# Altium PCB TFG_PSoC_PCB.PcbDoc
Units mm, origin at the board's own origin, x right, y up, seen from the top; angles counter-clockwise.
Board outline 28.96 x 63.5 mm, 6 copper layers (Top Layer, VDD, Signal Layer Top, Signal Layer Bottom, GND, Bottom Layer), stack 1.104 mm thick; 35 components, 24 nets, 191 pads, 90 vias.
Unrouted connection lines stored in the file: 13.
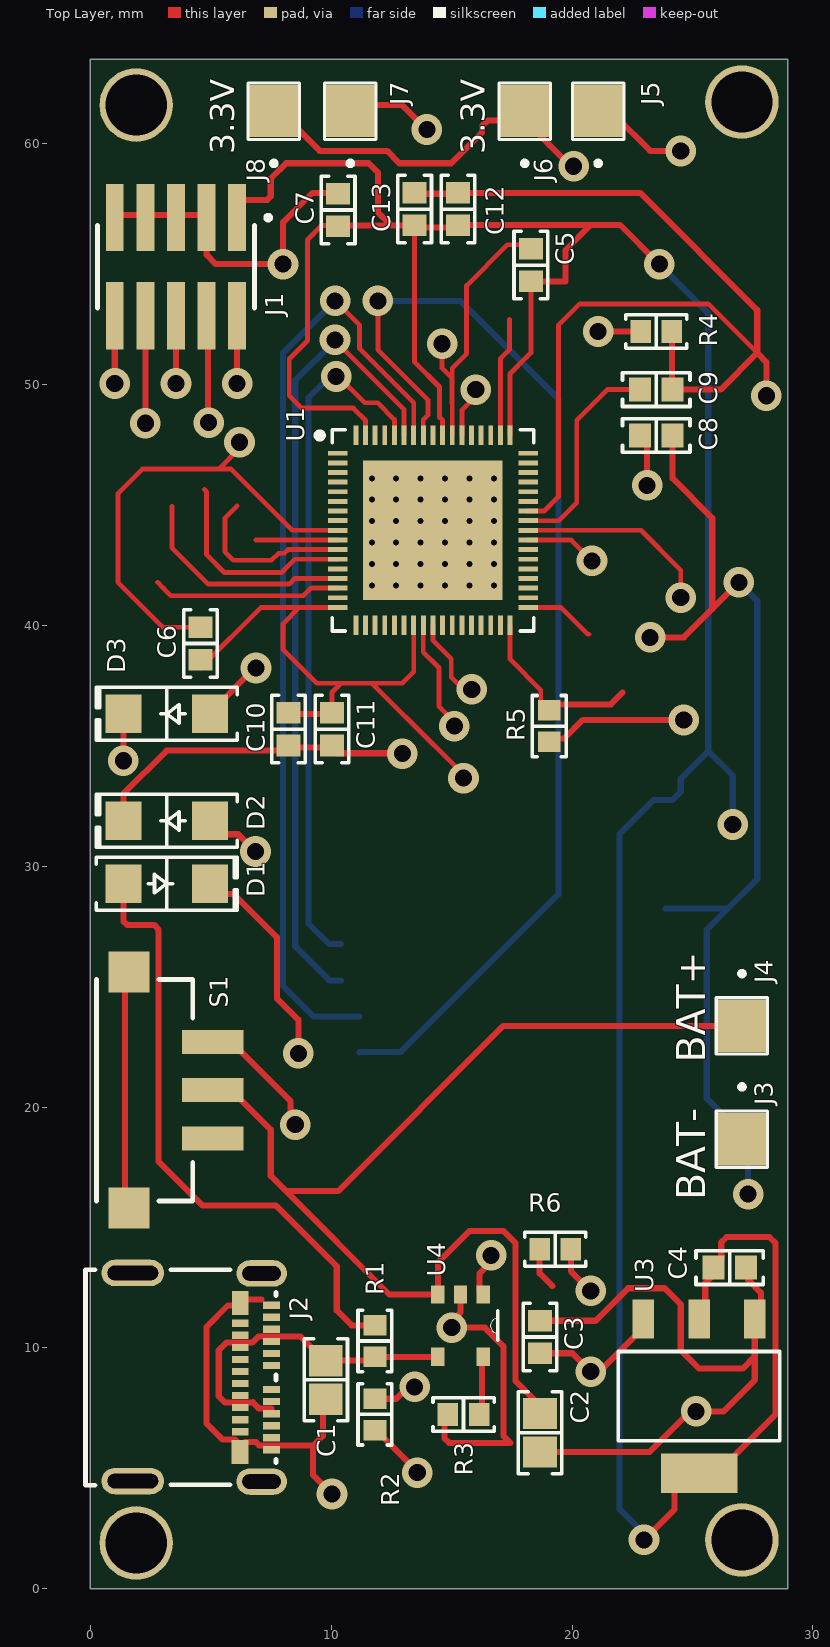
[diagram p0: Top Layer view]
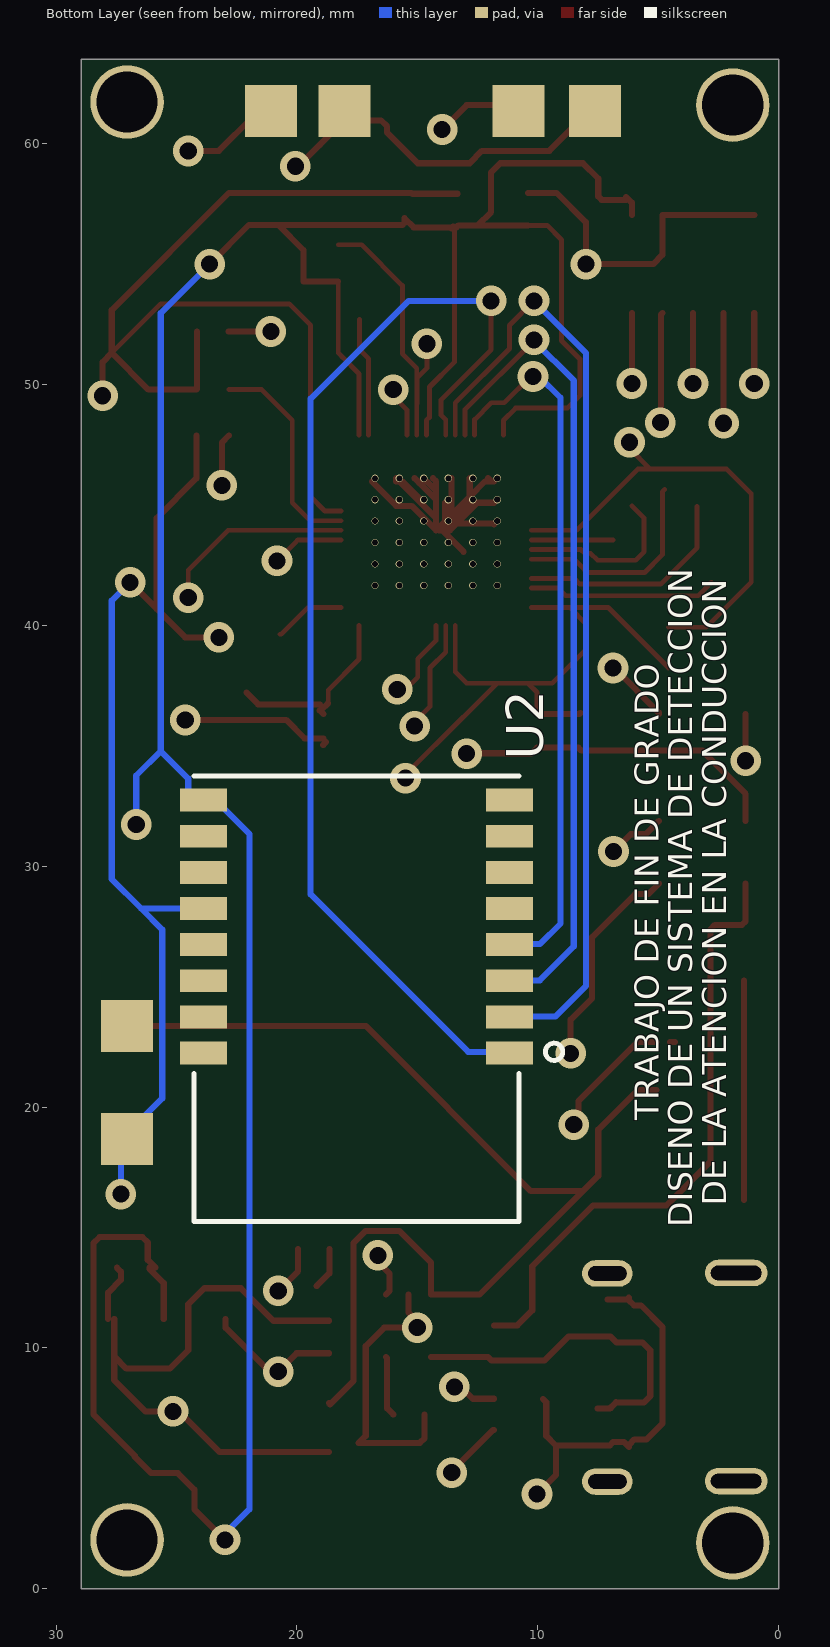
[diagram p1: Bottom Layer view, seen from below]
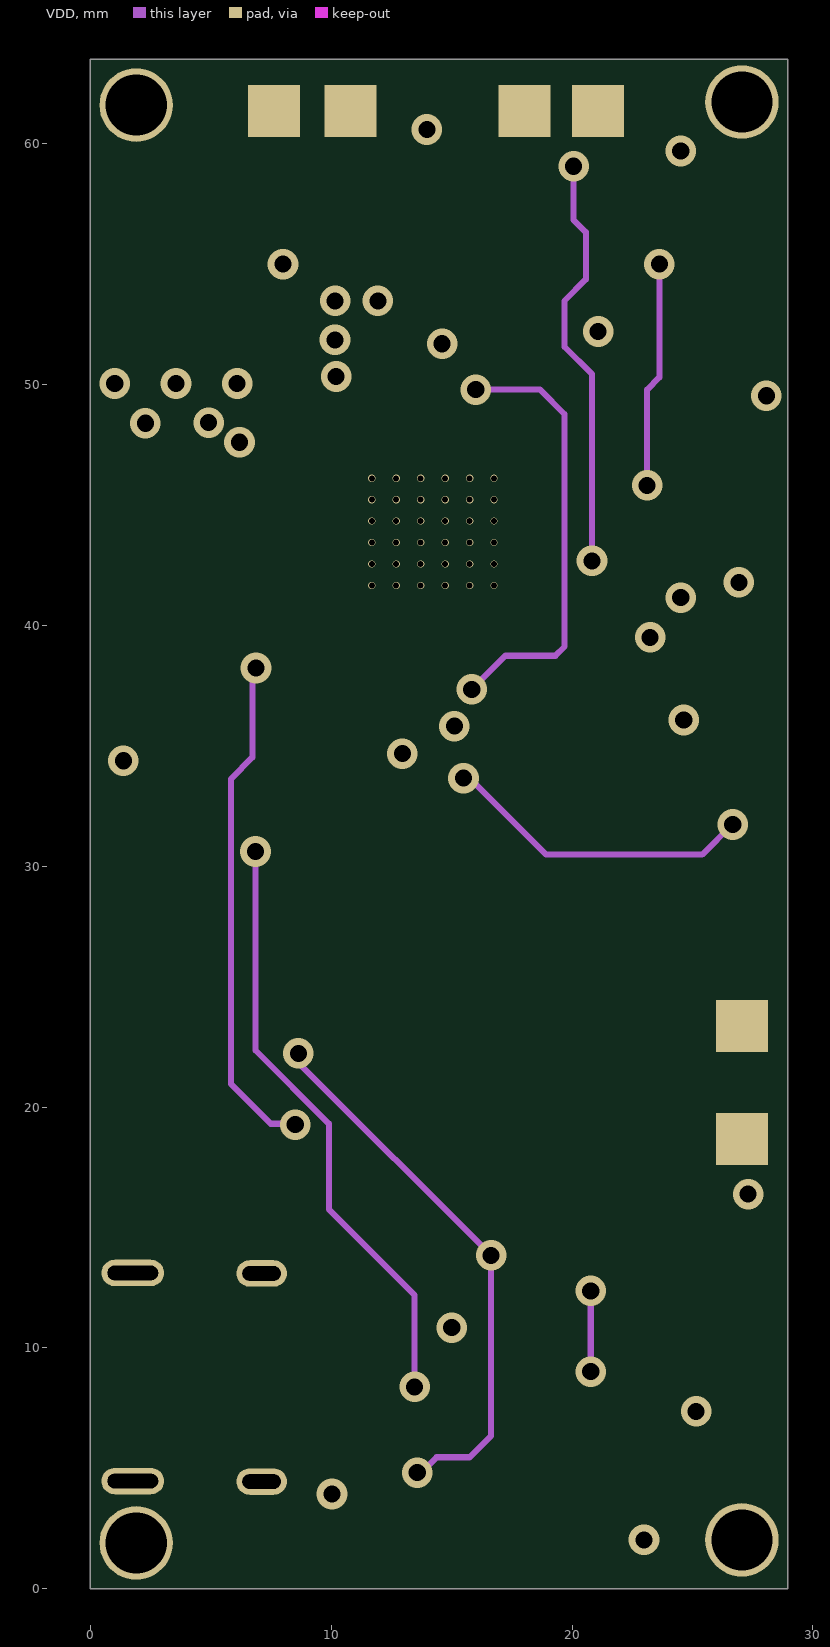
[diagram p2: VDD]
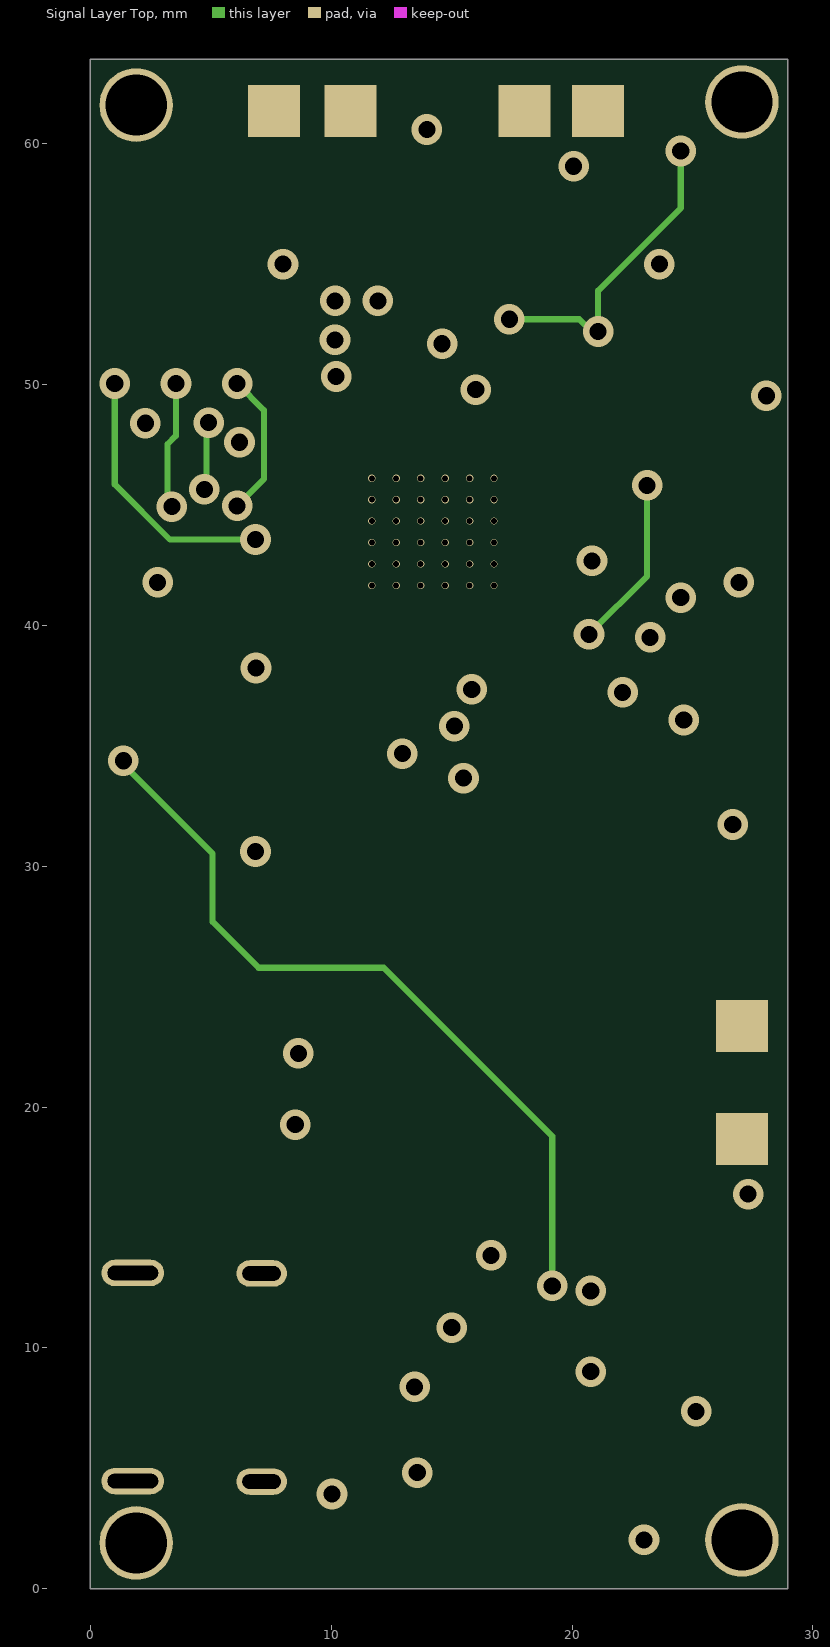
[diagram p3: Signal Layer Top]
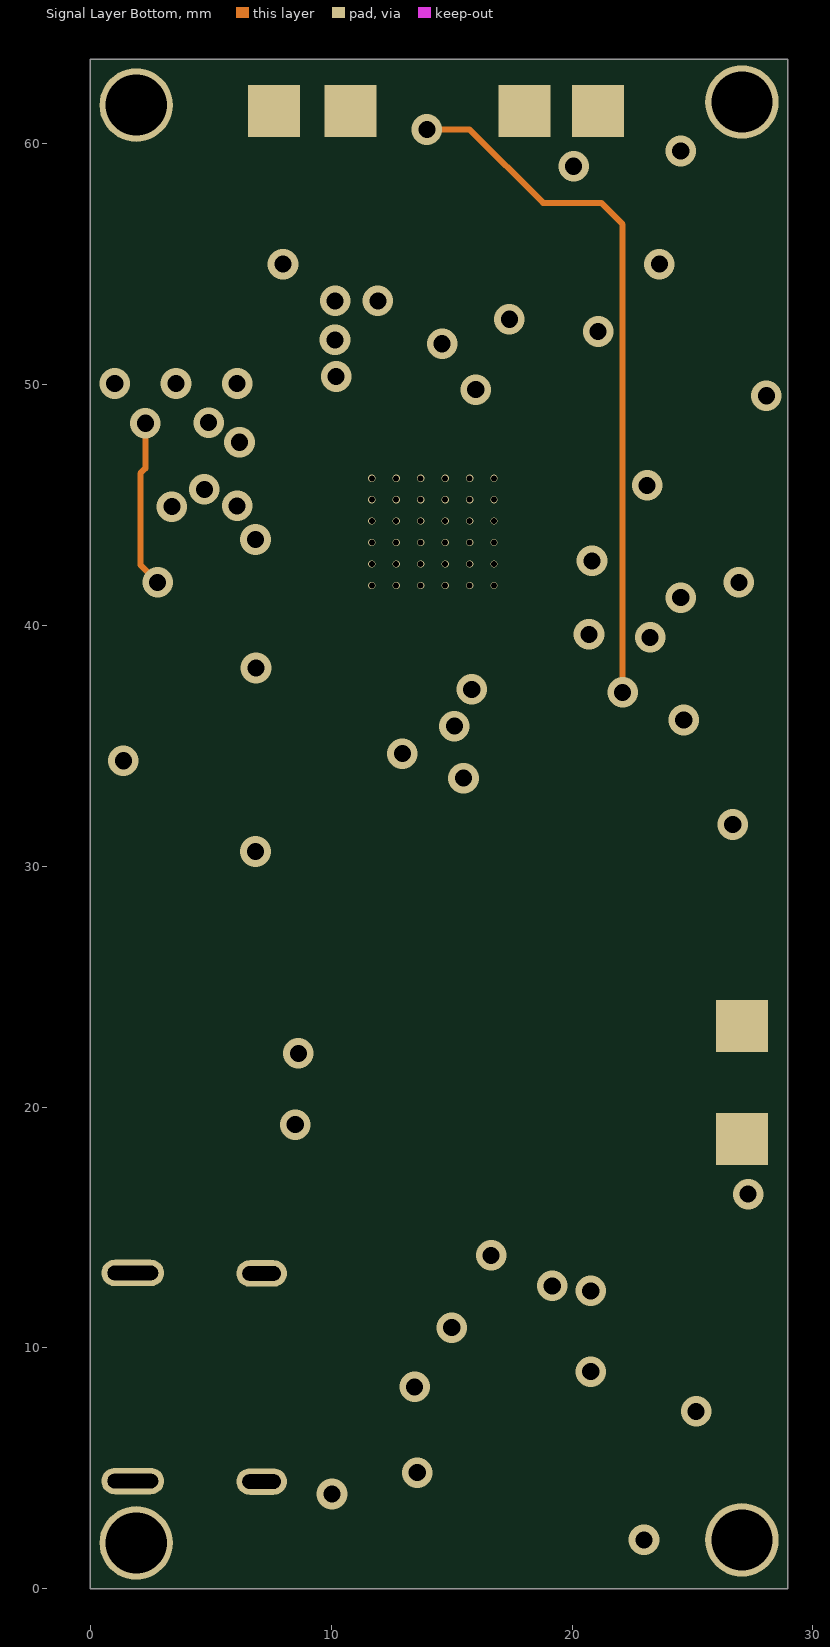
[diagram p4: Signal Layer Bottom]
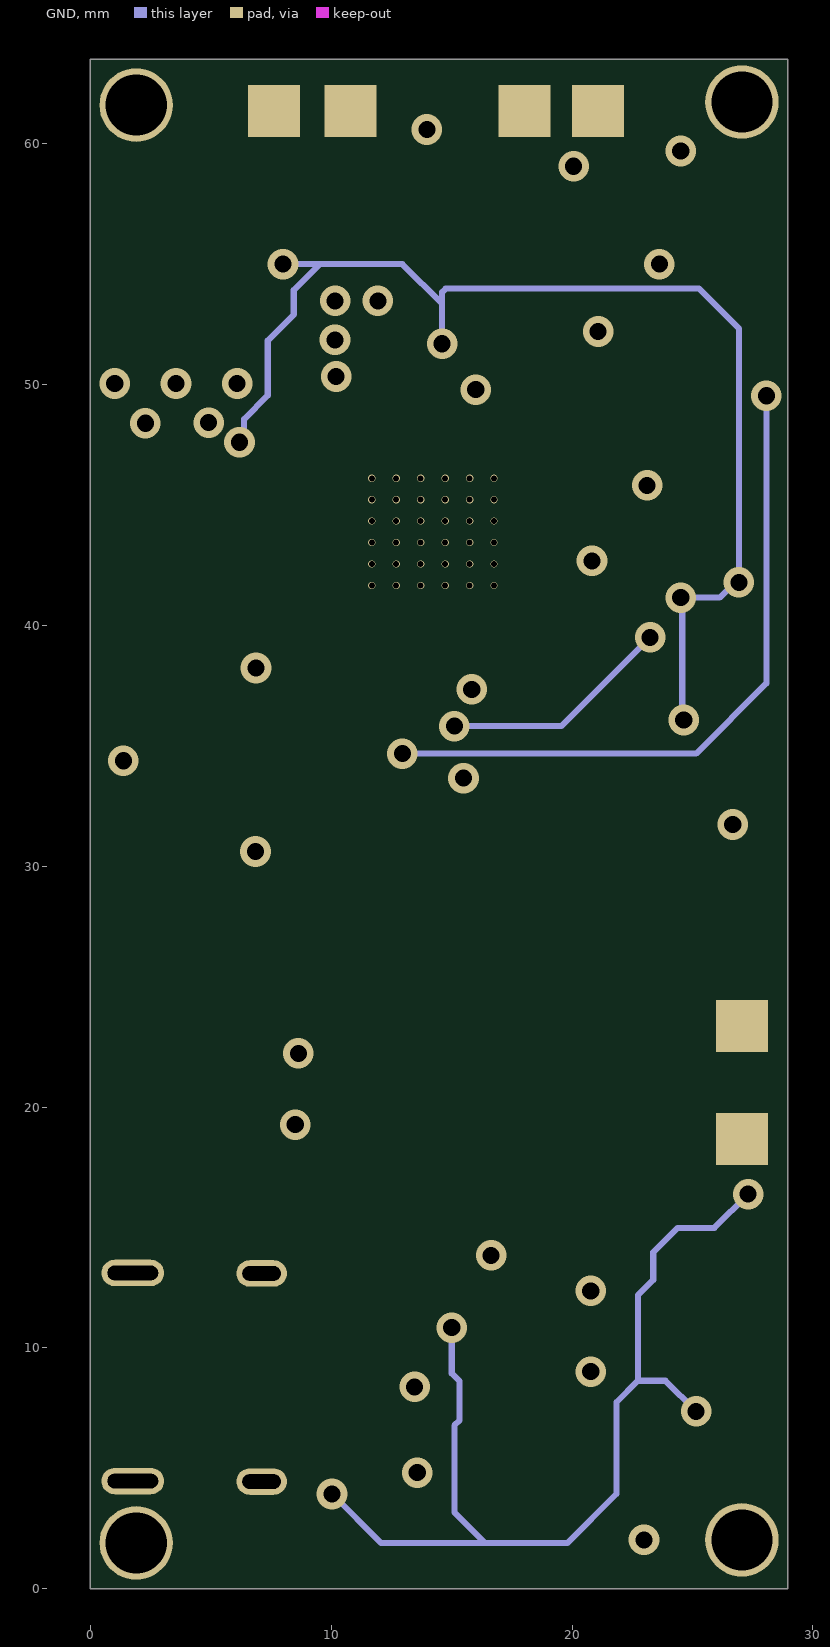
[diagram p5: GND]
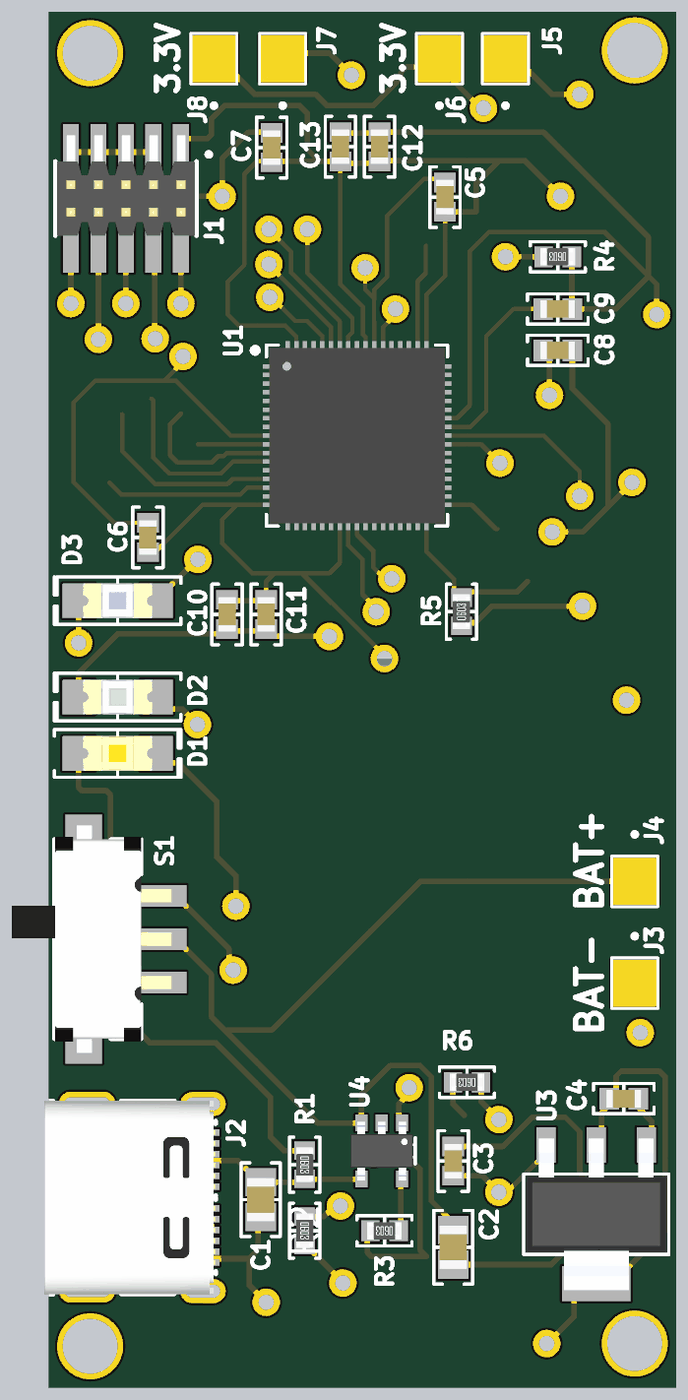
[diagram p6: 3D render of the assembled board from above, using the file's embedded part models]

## Layer stack, top to bottom
Top Solder: solder mask 0.0102, Solder Resist, Dk 3.5
Top Layer: signal copper 0.0356
Dielectric 1: core 0.254, PP-006, Dk 4.1
VDD: signal copper 0.036
Dielectric 5: prepreg 0.127, PP-006, Dk 4.1
Signal Layer Top: signal copper 0.036
Dielectric 3: dielectric 0.127, FR-4, Dk 4.8
Signal Layer Bottom: signal copper 0.036
Dielectric 2: prepreg 0.127, PP-006, Dk 4.1
GND: signal copper 0.036
Dielectric 4: core 0.254, PP-006, Dk 4.1
Bottom Layer: signal copper 0.0356
Bottom Solder: solder mask 0.0102, Solder Resist, Dk 3.5

## Board outline
0,0 0,63.5 28.956,63.5 28.956,0

## Design rules (kind name [scope] priority, off if disabled: settings)
Clearance [All] p1: gap=0.254 ignorepadtopadclearanceinfootprint=FALSE except(0: Arc-Hole Track-Hole SMDPad-Hole THPad-Hole Via-Hole Fill-Hole Poly-Hole Region-Hole Text-Hole)
PolygonConnect [All] p1: connectstyle=Relief reliefconductorwidth=0.254 reliefentries=4 polygonreliefangle="90 Angle" airgapwidth=0.254
RoutingVias [All] p1: holewidth=0.711 width=1.27 viastyle="Through Hole" minholewidth=0.711 minwidth=1.27 maxholewidth=0.711 maxwidth=1.27
SolderMaskExpansion [All] p1: expansion=0.102 istentingtop=FALSE
Width [All] p1: maxlimit=0.254 minlimit=0.254 preferedwidth=0.254
30 further rules are at their usual default settings.

## Components (designator, comment, footprint, x,y, rotation, side; value= is the part's Value field where it differs from the comment)
C1 "4.7 µF" "CAP 0805_2012" 9.779,8.674 r90 top
C2 "4.7 µF" "CAP 0805_2012" 18.669,6.477 r270 top
C3 "1 µF" "CAP 0603_1608" 18.669,10.454 r270 top
C4 "1 µF" "CAP 0603_1608" 26.543,13.335 r180 top
C5 "0.1 µF" "CAP 0603_1608" 18.288,54.951 r270 top
C6 "0.1 µF" "CAP 0603_1608" 4.572,39.243 r270 top
C7 "0.1 µF" "CAP 0603_1608" 10.287,57.237 r270 top
C8 "0.1 µF" "CAP 0603_1608" 23.495,47.879 r180 top
C9 "0.1 µF" "CAP 0603_1608" 23.495,49.784 r180 top
C10 "1 µF" "CAP 0603_1608" 8.229,35.687 r90 top
C11 "0.1 µF" "CAP 0603_1608" 10.033,35.687 r90 top
C12 "1 µF" "CAP 0603_1608" 15.266,57.277 r270 top
C13 "0.1 µF" "CAP 0603_1608" 13.462,57.277 r270 top
D1 "Red" "LED 1206_3216 YELLOW" 3.175,29.273 r0 top value=Yellow
D2 "Green" "LED 1206_3216 GREEN" 3.175,31.877 r180 top
D3 "Blue" "LED 1206_3216 BLUE" 3.175,36.322 r180 top
J1 "FTSH-105-01-F-DV-P-TR" SAMTEC_FTSH-105-01-F-DV-P-TR 3.556,54.887 r180 top
J2 "1054500101" "Molex 1054500101" 6.868,8.772 r270 top
J3 "103321-1" TE_103321-1 27.051,18.669 r0 top
J4 "103321-1" TE_103321-1 27.051,23.368 r0 top
J5 "103321-1" TE_103321-1 21.082,61.341 r180 top
J6 "103321-1" TE_103321-1 18.034,61.341 r180 top
J7 "103321-1" TE_103321-1 10.795,61.341 r180 top
J8 "103321-1" TE_103321-1 7.62,61.341 r180 top
R1 "470 Ohms" "RES 0603_1608" 11.811,10.287 r270 top
R2 "470 Ohms" "RES 0603_1608" 11.811,7.239 r270 top
R3 "20 kOhms" "RES 0603_1608" 15.494,7.239 r180 top
R4 "30 kOhms" "RES 0603_1608" 23.495,52.197 r180 top
R5 "30 kOhms" "RES 0603_1608" 19.05,35.814 r90 top
R6 "470 Ohms" "RES 0603_1608" 19.304,14.097 r180 top
S1 "SS312SAH4-R" "NKK SS312SAH4" 2.255,20.701 r0 top
U1 "CY8C5888LTI-LP097" QFN-68 14.224,43.942 r0 top
U2 "HM-11" XCVR_317030001 17.526,24.492 r0 bottom
U3 "ADP3338" SOT230P700X180-4N 25.273,8.001 r270 top
U4 "MCP73831T-2ADI/OT" SOT95P280X145-5N 15.367,10.922 r270 top

## Footprints (in the part's own frame and the unit in brackets; to place one, negate y for a bottom-side part, rotate by r counter-clockwise, add the part's x,y. Pads: shape width x height; smd on the part's side, far side on the other; paste and mask are expansions set on the pad)
"CAP 0603_1608" [mm] "Chip Capacitor, 2-Leads, Body 1.60x0.80mm, IPC Medium Density"
  rect 0.9x1 smd: 1(-0.675,0) 2(0.675,0)
  silkscreen extent -1.4,-0.7 1.4,0.7, body extent -0.8,-0.41 0.8,0.41, height 0.82
"CAP 0805_2012" [mm] "Chip Capacitor, 2-Leads, Body 2.00x1.20mm, IPC Medium Density"
  rect 1.3x1.4 smd: 1(-0.8,0) 2(0.8,0)
  silkscreen extent -1.7,-0.9 1.7,0.9, body extent -1,-0.64 1,0.64, height 1.26
"LED 1206_3216 BLUE" [mm] "Chip Diode, 2-Leads, Body 3.13x1.55mm, IPC Medium Density"
  rect 1.5x1.6 smd: 1(-1.8,0) 2(1.8,0)
  silkscreen extent -2.92,-1.1 2.92,1.1, body extent -1.6,-0.8 1.6,0.8, height 0.9
"LED 1206_3216 GREEN" [mm] "Chip Diode, 2-Leads, Body 3.13x1.55mm, IPC Medium Density"
  rect 1.5x1.6 smd: 1(-1.8,0) 2(1.8,0)
  silkscreen extent -2.92,-1.1 2.92,1.1, body extent -1.6,-0.8 1.6,0.8, height 0.9
"LED 1206_3216 YELLOW" [mm] "Chip Diode, 2-Leads, Body 3.13x1.55mm, IPC Medium Density"
  rect 1.5x1.6 smd: 1(-1.8,0) 2(1.8,0)
  silkscreen extent -2.92,-1.1 2.92,1.1, body extent -1.6,-0.8 1.6,0.8, height 0.9
"Molex 1054500101" [mm] "USB-C Receptacle Connector 24 Position Surface Mount, 24 Position, Body 8.94x7.90mm"
  rect 0.3x0.7 smd: A1(-3,0.655) A2(-2.5,0.655) A3(-2,0.655) A4(-1.5,0.655) A5(-1,0.655) A6(-0.5,0.655) A7(0.5,0.655) A8(1,0.655) A9(1.5,0.655) A10(2,0.655) A11(2.5,0.655) A12(3,0.655) B2(2.25,-0.645) B3(1.75,-0.645) B4(1.25,-0.645) B5(0.75,-0.645) B6(0.25,-0.645) B7(-0.25,-0.645) B8(-0.75,-0.645) B9(-1.25,-0.645) B10(-1.75,-0.645) B11(-2.25,-0.645)
  rect 1x0.7 smd: B1(3.1,-0.655) B12(-3.1,-0.645)
  oval 1.1x2.6 hole 2.1 slot 0.6 at 0 deg unplated: S(-4.34,-5.105) S(4.3,-5.105)
  oval 1.1x2.1 hole 1.6 slot 0.6 at 0 deg unplated: S(-4.32,0.245) S(4.32,0.245)
  silkscreen extent -4.47,-7.06 4.47,0.84, body extent -4.47,-7.07 4.47,0.83, height 3.21
"NKK SS312SAH4" [mm]
  rect 2.55x1 smd: 1(2.825,-2) 2(2.825,0) 3(2.825,2)
  rect 1.7x1.7 smd: M(-0.65,-4.9) M(-0.65,4.9)
  silkscreen extent -2,-4.6 2,4.6, body extent -3.98,-5.25 3.42,5.25, height 2.9
QFN-68 [mil]
  rect 32x8 smd paste+0 mask+0: 1(-155.5,125.98) 2(-155.5,110.24) 3(-155.5,94.49) 4(-155.5,78.74) 5(-155.5,62.99) 6(-155.5,47.24) 7(-155.5,31.5) 8(-155.5,15.75) 9(-155.5,0) 10(-155.5,-15.75) 11(-155.5,-31.5) 12(-155.5,-47.24) 13(-155.5,-62.99) 14(-155.5,-78.74) 15(-155.5,-94.49) 16(-155.5,-110.24) 17(-155.5,-125.98) 35(155.5,-125.98) 36(155.5,-110.24) 37(155.5,-94.49) 38(155.5,-78.74) 39(155.5,-62.99) 40(155.5,-47.24) 41(155.5,-31.5) 42(155.5,-15.75) 43(155.5,0) 44(155.5,15.75) 45(155.5,31.5) 46(155.5,47.24) 47(155.5,62.99) 48(155.5,78.74) 49(155.5,94.49) 50(155.5,110.24) 51(155.5,125.98)
  rect 8x32 smd paste+0 mask+0: 18(-125.98,-155.5) 19(-110.24,-155.5) 20(-94.49,-155.5) 21(-78.74,-155.5) 22(-62.99,-155.5) 23(-47.24,-155.5) 24(-31.5,-155.5) 25(-15.75,-155.5) 26(0,-155.5) 27(15.75,-155.5) 28(31.5,-155.5) 29(47.24,-155.5) 30(62.99,-155.5) 31(78.74,-155.5) 32(94.49,-155.5) 33(110.24,-155.5) 34(125.98,-155.5) 52(125.98,155.5) 53(110.24,155.5) 54(94.49,155.5) 55(78.74,155.5) 56(62.99,155.5) 57(47.24,155.5) 58(31.5,155.5) 59(15.75,155.5) 60(0,155.5) 61(-15.75,155.5) 62(-31.5,155.5) 63(-47.24,155.5) 64(-62.99,155.5) 65(-78.74,155.5) 66(-94.49,155.5) 67(-110.24,155.5) 68(-125.98,155.5)
  rect 228x228 smd paste-113.5 mask+0: 69(0,0)
  silkscreen extent -190,-164 164,164, body extent -159,-159 159,159, height 39
"RES 0603_1608" [mm] "Chip Resistor, 2-Leads, Body 1.60x0.80mm, IPC Medium Density"
  rect 0.85x0.95 smd: 1(-0.65,0) 2(0.65,0)
  silkscreen extent -1.27,-0.7 1.27,0.7, body extent -0.8,-0.4 0.8,0.4, height 0.45
SAMTEC_FTSH-105-01-F-DV-P-TR [mm]
  rect 0.74x2.79 smd: 01(-2.54,-2.035) 02(-2.54,2.035) 03(-1.27,-2.035) 04(-1.27,2.035) 05(0,-2.035) 06(0,2.035) 07(1.27,-2.035) 08(1.27,2.035) 09(2.54,-2.035) 10(2.54,2.035)
  silkscreen extent -3.93,-2.13 3.26,1.72, body extent -3.18,-2.92 3.18,2.92, height 5.56
SOT95P280X145-5N [mil]
  rect 30x22 smd: 1(-51,37) 2(-51,0) 3(-51,-37) 4(51,-37) 5(51,37)
  silkscreen extent -24,49 24,61, body extent -53,-57 53,57, height 57
SOT230P700X180-4N [mil]
  rect 64x35 smd: 1(-126,91) 2(-126,0) 3(-126,-91)
  rect 64x125 smd: 4(126,0)
  silkscreen extent -73,-132 73,132, body extent -138,-128 138,128, height 71
TE_103321-1 [mil]
  rect 85x85 all layers, no hole: 1(0,0)
  silkscreen extent -42,-46 42,89
XCVR_317030001 [mm]
  rect 1.95x0.95 smd: 1(-6.35,2.25) 2(-6.35,0.75) 3(-6.35,-0.75) 4(-6.35,-2.25) 5(-6.35,-3.75) 6(-6.35,-5.25) 7(-6.35,-6.75) 8(-6.35,-8.25) 9(6.35,-8.25) 10(6.35,-6.75) 11(6.35,-5.25) 12(6.35,-3.75) 13(6.35,-2.25) 14(6.35,-0.75) 15(6.35,0.75) 16(6.35,2.25)
  silkscreen extent -8.56,-9.25 6.75,9.25, body extent -6.81,-9.15 6.69,9.35, height 1.7

## Part data
C1 C2: library part CL21B475KOFNFNE, "CAP CER 4.7UF 16V X7R 0805", Device Package="0805 (2012 Metric)", manufacturer="Samsung Electro-Mechanics", Operating Temperature="-55°C ~ 125°C", Supplier Part Number 1=1276-2970-1-ND, Temperature Coefficient=X7R, Tolerance=±10%, Voltage - Rated=16V, Applications="General Purpose", Capacitance="4.7 µF", componentlink1description=Datasheet, componentlink1url=http://www.samsungsem.com/kr/support/product-search/mlcc/CL21B475KOFNFNE.jsp, componentlink2description="DigiKey Link", componentlink2url=https://www.digikey.com/en/products/detail/samsung-electro-mechanics/CL21B475KOFNFNE/3888628, lastupdated="27/06/2022 11:05:52", Lifecycle Status=Active, Minimum Order=1, Mounting Type="Surface Mount, MLCC", Package / Case="0805 (2012 Metric)", packaging=TapeAndReel, Part Number=CL21B475KOFNFNE, Part Status=Active, partid=4760, price=0.03, series=CL, Size / Dimension="0.079\" L x 0.049\" W (2.00mm x 1.25mm)", Supplier 1=DigiKey, Thickness (Max)="0.053\" (1.35mm)"
C3 C4 C10 C12: library part C0603X105M4RACAUTO, "CAP CER 1UF 16V X7R 0603", Device Package="0603 (1608 Metric)", manufacturer=KEMET, Operating Temperature="-55°C ~ 125°C", Ratings=AEC-Q200, Supplier Part Number 1=399-17719-2-ND, Temperature Coefficient=X7R, Tolerance=±20%, Voltage - Rated=16V, Applications="Automotive, Boardflex Sensitive", Capacitance="1 µF", componentlink1description=Datasheet, componentlink1url=https://api.kemet.com/component-edge/download/datasheet/C0603X105M4RACAUTO.pdf, componentlink2description="DigiKey Link", componentlink2url=https://www.digikey.com/en/products/detail/kemet/C0603X105M4RACAUTO/8635846, Features="Soft Termination", lastupdated="27/06/2022 11:02:50", Lifecycle Status=Active, Minimum Order=1, Mounting Type="Surface Mount, MLCC", Package / Case="0603 (1608 Metric)", packaging=CutTape, Part Number=C0603X105M4RACAUTO, Part Status=Active, partid=3927, price=0.09, series="SMD Auto X7R Flex", Size / Dimension="0.063\" L x 0.031\" W (1.60mm x 0.80mm)", Supplier 1=DigiKey, Thickness (Max)="0.037\" (0.95mm)"
C5 C6 C7 C8 C9 C11 C13: library part CS0603KRX7R7BB104, "CAP CER 0.1UF 16V X7R 0603", Device Package="0603 (1608 Metric)", manufacturer=Yageo, Operating Temperature="-55°C ~ 125°C", Supplier Part Number 1=311-3560-1-ND, Temperature Coefficient=X7R, Tolerance=±10%, Voltage - Rated=16V, Applications="Boardflex Sensitive", Capacitance="0.1 µF", componentlink1description=Datasheet, componentlink1url=http://www.yageo.com/NewPortal/yageodocoutput?fileName=/pdf/MLCC/UPY-ST_NPOX7R_16V-to-3KV_5.pdf, componentlink2description="DigiKey Link", componentlink2url=https://www.digikey.com/en/products/detail/yageo/CS0603KRX7R7BB104/6097897, Features="Soft Termination", lastupdated="27/06/2022 11:02:54", Lifecycle Status=Active, Minimum Order=1, Mounting Type="Surface Mount, MLCC", Package / Case="0603 (1608 Metric)", packaging=TapeAndReel, Part Number=CS0603KRX7R7BB104, Part Status=Active, partid=2286, price=0.02, series=CS, Size / Dimension="0.063\" L x 0.031\" W (1.60mm x 0.80mm)", Supplier 1=DigiKey, Thickness (Max)="0.037\" (0.95mm)"
D1: library part 5990240007F, "LED YELLOW 1206 SMD", Color=Yellow, Current - Test=20mA, Device Package="1206 (3216 Metric)", Lens Color=0.80mm, manufacturer=Dialight, Millicandela Rating=126mcd, Supplier Device Package=1206, Supplier Part Number 1=350-4363-1-ND, Voltage - Forward (Vf) (Typ)=2.1V, componentlink1description=Datasheet, componentlink1url=http://www.dialightsignalsandcomponents.com/Assets/Brochures_And_Catalogs/Indication/CBI_SMD_new/Dialight_CBI_data_599-1206_Apr2018.pdf, componentlink2description="DigiKey Link", componentlink2url=https://www.digikey.com/en/products/detail/dialight/5990240007F/9385418, Configuration=Standard, Height (Max)=0.80mm, lastupdated="27/06/2022 11:49:43", Lens Size="2.00mm x 1.60mm", Lens Style="Rectangle with Flat Top", Lifecycle Status=Active, Minimum Order=1, Mounting Type="Surface Mount", Package / Case="1206 (3216 Metric)", packaging=TapeAndReel, Part Number=5990240007F, Part Status=Active, partid=1, price=0.04, series=599, Size / Dimension="3.20mm L x 1.60mm W", Supplier 1=DigiKey, Viewing Angle=140°, Wavelength - Dominant=590nm
D2: library part SM1206GC-IL, "LED GREEN CLEAR 1206 SMD", Current - Test=20mA, Device Package="1206 (3216 Metric)", Lens Color=Colorless, manufacturer="Bivar Inc.", Millicandela Rating=40mcd, Supplier Device Package=1206, Supplier Part Number 1=492-1697-1-ND, Voltage - Forward (Vf) (Typ)=2V, Color=Green, componentlink1description=Datasheet, componentlink1url=https://www.bivar.com/Files/Datasheets/SM1206GC-IL.pdf, componentlink2description="DigiKey Link", componentlink2url=https://www.digikey.com/en/products/detail/bivar-inc/SM1206GC-IL/3095544, Configuration=Standard, Height (Max)=1.40mm, lastupdated="27/06/2022 11:49:06", Lens Size="1.10mm Dia", Lens Style="Round with Flat Top", Lens Transparency=Clear, Lifecycle Status=Active, Minimum Order=1, Mounting Type="Surface Mount", Package / Case="1206 (3216 Metric)", packaging=TapeAndReel, Part Number=SM1206GC-IL, Part Status=Active, partid=536, price=0.24, series=-, Size / Dimension="3.20mm L x 1.60mm W", Supplier 1=DigiKey, Viewing Angle=30°, Wavelength - Dominant=570nm, Wavelength - Peak=568nm
D3: library part 5990291007F, "LED BLUE 1206 SMD", Part Number=5990291007F
J1: Package=None, Availability=Unavailable, MF=Samtec, MP=FTSH-105-01-F-DV-P-TR, price=None
J2: "CONN RCP USB3.1 TYPEC 24P SMD RA", Current Rating (Amps)="0.25A, 1A, 5A", manufacturer=Molex, Operating Temperature="-30°C ~ 85°C", Supplier Part Number 1=WM12856CT-ND, Voltage - Rated=30VAC/DC, componentlink1description=Datasheet, componentlink1url=https://www.molex.com/pdm_docs/ps/PS-105448-001.pdf, componentlink2description="DigiKey Link", componentlink2url=http://digikey.com/product-detail/en/molex/1054500101/WM12856CT-ND/5843891, Connector Type="USB - C (Type - C)", Gender=Receptacle, lastupdated="06/06/2020 2:14:04", Lifecycle Status=Active, Mating Cycles=10000, Minimum Order=1, Mounting Feature=Horizontal, Mounting Type="Surface Mount, Right Angle; Through Hole", Number of Contacts=24, Number of Ports=1, packaging=TapeAndReel, Part Number=1054500101, Part Status=Active, price=1.22, series=105445, Shielding=Shielded, Specifications="USB 3.1 (USB 3.1 Gen 2, Superspeed+)", Supplier 1=DigiKey, Termination=Solder
J3 J4 J5 J6 J7 J8: "Pin 01 MODII HDR SRST B/A .100CL 1 POS", Package=None, Availability=Bad, Check_prices=https://www.snapeda.com/parts/103321-1/TE%20Connectivity/view-part/4238470/?ref=eda, MF="TE Connectivity", MP=103321-1, price=None, SnapEDA_Link=https://www.snapeda.com/parts/103321-1/TE%20Connectivity/view-part/4238470/?ref=snap
R1 R2 R6: library part RN73R1JTTD2200B25, "RES 220 OHM 0.1% 1/10W 0603", Device Package="0603 (1608 Metric)", manufacturer="KOA Speer Electronics, Inc.", Operating Temperature="-55°C ~ 155°C", Power (Watts)="0.1W, 1/10W", Resistance="220 Ohms", Supplier Device Package=0603, Supplier Part Number 1=2019-RN73R1JTTD2200B25CT-ND, Temperature Coefficient=±25ppm/°C, Tolerance=±0.1%, componentlink1description=Datasheet, componentlink1url=//media.digikey.com/pdf/Data%20Sheets/KOA%20Speer/RN73R_Type_DS.pdf, componentlink2description="DigiKey Link", componentlink2url=http://digikey.com/product-detail/en/koa-speer-electronics-inc/RN73R1JTTD2200B25/2019-RN73R1JTTD2200B25CT-ND/9991980, Composition="Metal Film", Features="Moisture Resistant", Height - Seated (Max)="0.022\" (0.55mm)", lastupdated="27/06/2022 11:23:46", Lifecycle Status=Active, Minimum Order=1, Number of Terminations=2, Package / Case="0603 (1608 Metric)", packaging=TapeAndReel, Part Number=RN73R1JTTD2200B25, Part Status=Active, partid=8403, price=0.06, series=RN73R, Size / Dimension="0.063\" L x 0.031\" W (1.60mm x 0.80mm)", Supplier 1=DigiKey
R3: library part CR0603-FX-2002ELF, "RES SMD 20K OHM 1% 1/10W 0603", Device Package="0603 (1608 Metric)", manufacturer="Bourns Inc.", Operating Temperature="-55°C ~ 155°C", Power (Watts)="0.1W, 1/10W", Supplier Device Package=0603, Supplier Part Number 1=CR0603-FX-2002ELFCT-ND, Temperature Coefficient=±100ppm/°C, Tolerance=±1%, componentlink1description=Datasheet, componentlink1url=https://www.bourns.com/docs/Product-Datasheets/CHPREZTR.pdf, componentlink2description="DigiKey Link", componentlink2url=https://www.digikey.com/en/products/detail/bourns-inc/CR0603-FX-2002ELF/3740911, Composition="Thick Film", Features="Moisture Resistant", Height - Seated (Max)="0.022\" (0.55mm)", lastupdated="27/06/2022 11:22:32", Lifecycle Status=Active, Minimum Order=1, Number of Terminations=2, Package / Case="0603 (1608 Metric)", packaging=CutTape, Part Number=CR0603-FX-2002ELF, Part Status=Active, partid=25447, price=0.01, Resistance="20 kOhms", series=CR0603, Size / Dimension="0.063\" L x 0.031\" W (1.60mm x 0.80mm)", Supplier 1=DigiKey
R4 R5: library part ERA-3AEB303V, "RES SMD 30K OHM 0.1% 1/10W 0603", Device Package="0603 (1608 Metric)", manufacturer="Panasonic Electronic Components", Operating Temperature="-55°C ~ 155°C", Power (Watts)="0.1W, 1/10W", Ratings=AEC-Q200, Supplier Device Package=0603, Supplier Part Number 1=P30KDBCT-ND, Temperature Coefficient=±25ppm/°C, Tolerance=±0.1%, componentlink1description=Datasheet, componentlink1url=https://industrial.panasonic.com/cdbs/www-data/pdf/RDM0000/AOA0000C307.pdf, componentlink2description="DigiKey Link", componentlink2url=https://www.digikey.com/en/products/detail/panasonic-electronic-components/ERA-3AEB303V/1465889, Composition="Thin Film", Features="Automotive AEC-Q200", Height - Seated (Max)="0.022\" (0.55mm)", lastupdated="27/06/2022 11:23:56", Lifecycle Status=Active, Minimum Order=1, Number of Terminations=2, Package / Case="0603 (1608 Metric)", packaging=TapeAndReel, Part Number=ERA-3AEB303V, Part Status=Active, partid=5528, price=0.04, Resistance="30 kOhms", series=ERA-3A, Size / Dimension="0.063\" L x 0.031\" W (1.60mm x 0.80mm)", Supplier 1=DigiKey
S1: "SWITCH SLIDE SPDT 0.4VA 28V", Current Rating (Amps)="0.4VA (AC/DC)", manufacturer="NKK Switches", Operating Temperature="-25°C ~ 85°C", Supplier Part Number 1=360-2924-1-ND, Voltage Rating - AC=28V, Actuator Length=2.00mm, Actuator Type=Standard, Circuit=SPDT, componentlink1description=Datasheet, componentlink1url=http://www.nkkswitches.com/pdf/SS3surfaceMount-1.pdf, componentlink2description="DigiKey Link", componentlink2url=http://digikey.com/product-detail/en/nkk-switches/SS312SAH4-R/360-2924-1-ND/1051215, Contact Finish=Gold, Contact Material="Phosphor Bronze", Contact Timing="Shorting (MBB)", lastupdated="04/01/2020 19:10:14", Lifecycle Status=Active, Minimum Order=1, Mounting Type="Surface Mount, Right Angle", packaging=TapeAndReel, Part Number=SS312SAH4-R, Part Status=Active, partid=1, price=1.95, series=SS3, Supplier 1=DigiKey, Switch Function=On-On, Termination Style="Gull Wing", Voltage Rating - DC=28V
U1: Manufacturer Name=CYPRESS, Part Number=CY8C5868LTI-LP036
U2: library part 317030001, "Bluetooth Bluetooth v4.0 Transceiver Module 2.4GHz Integrated, Trace Surface Mount", Package="Module Seeed Technology", Digi-Key_Part_Number=1597-1359-ND, Digi-Key_Purchase_URL=https://www.digikey.kr/product-detail/en/seeed-technology-co-ltd/317030001/1597-1359-ND/5487659?utm_source=snapeda&utm_medium=aggregator&utm_campaign=symbol, MF="Seeed Technology", MP=317030001, SnapEDA_Link=https://www.snapeda.com/parts/317030001/Seeed%20Technology%20Co.%2C%20Ltd/view-part/449174/?ref=snap
U3: library part ADP3338AKCZ-3.3-RL, "Linear Voltage Regulator IC Positive Fixed 1 Output 1A SOT-223-3", Package="SOT-223-3 Analog Devices", Check_prices=https://www.snapeda.com/parts/ADP3338AKCZ-3.3-RL/Analog%20Devices%20Inc./view-part/1133809/?ref=eda, Digi-Key_Part_Number=ADP3338AKCZ-3.3-RLCT-ND, MF="Analog Devices", MP=ADP3338AKCZ-3.3-RL, Purchase-URL=https://pricing.snapeda.com/search/part/ADP3338AKCZ-3.3-RL/?ref=eda, SnapEDA_Link=https://www.snapeda.com/parts/ADP3338AKCZ-3.3-RL/Analog%20Devices%20Inc./view-part/1133809/?ref=snap
U4: library part MCP73831T-4ADI/OT, "Charger IC Lithium Ion/Polymer SOT-23-5", Package="SOT-23-5 Microchip", Availability=Unavailable, MF=Microchip, MP=MCP73831T-4ADI/OT, price=None, SnapEDA_Link=https://www.snapeda.com/parts/MCP73831T-4ADI/OT/Microchip/view-part/1037576/?ref=snap

## Free pads (board coordinates)
  round 3.048 hole 2.54: 1(1.905,61.595) 2(27.051,61.722) 3(1.905,1.905) 4(27.051,2.032)

## Via types
v1: diameter 1.27, hole 0.711, Top Layer to Bottom Layer, 45 vias
v2: diameter 0.3, hole 0.25, Top Layer to Bottom Layer, 36 vias
v3: diameter 1.27, hole 0.711, Signal Layer Top to Signal Layer Bottom, 9 vias

## Nets (pads, with @x,y where several pads share a name; then routed paths per layer and width w, separated by ;. In a path a pad name is that pad's centre, name@x,y a point inside that pad or via, vN(x,y) a via of type N, cw(c..) or ccw(c..) an arc to the next point about the centre after c; other vN are vias at no path point)
/XRES: J1.10 U1.10 | length 17.3
  Top Layer w0.2: 6.877,43.542 U1.10
  Top Layer w0.254: v1(1.016,50.038) J1.10@1.016,52.959
  Signal Layer Top w0.254: v1(1.016,50.038) 1.016,45.847 3.302,43.561 v3(6.858,43.561)
GND: C1.1 C2.2 C3.1 C4.1 C5.1 C6.1 C7.1 C8.1 C9.1 C10.1 C11.1 C12.1 C13.1 D2.2 J1.03 J1.05 J1.07 J1.09 J2.A1 J2.A12 J2.B1 J2.B12 J3.1 R3.2 R4.1 R5.1 U1.9 U1.25 U1.43 U1.45 U1.58 U2.12 U3.1 U4.2 | length 353.4
  Top Layer w0.2: C6.1 3.008,39.918 1.143,41.783 1.143,45.466 2.159,46.482 5.334,46.482 ; v1(6.193,47.595) 6.193,47.341 5.334,46.482 ; U1.9 8.382,43.942 5.842,46.482 5.334,46.482 ; U1.25 13.824,38.881 14.478,38.227 14.478,36.616 v1@15.113,35.981 ; v1(14.605,51.689) 14.605,50.673 15.024,50.254 ; U1.58 15.024,49.19 15.013,49.201 15.013,50.194 15.024,50.205 15.024,50.254 ; U1.43 22.86,43.942 24.511,42.291 v1(24.511,41.148) ; U1.45 18.834,44.742 19.431,45.339 19.431,52.451 20.32,53.34 25.654,53.34 27.686,51.308 ; C5.1@18.288,55.793 17.312,55.793 15.621,54.102 15.621,51.27 15.024,50.673 15.024,50.254
  Top Layer w0.254: J1.09@1.016,57.029 J1.03@4.826,57.029 ; D2.2 1.375,32.998 3.175,34.798 8.189,34.798 8.316,34.925 10.033,34.925 10.269,34.689 12.936,34.689 v1(12.954,34.671) ; J1.07@2.286,57.029 J1.03@4.826,57.029 ; J1.05@3.556,57.029 J1.03@4.826,57.029 ; 7.112,12.012 6.292,12.012 6.223,12.081 6.223,11.985 6,11.762 5.715,11.762 4.826,10.873 4.826,6.858 5.484,6.2 5.99,6.2 6.213,5.977 6.213,5.881 6.428,6.096 6.869,6.096 7.015,5.95 9.252,5.95 ; C1.1 9.652,7.747 9.652,6.35 9.252,5.95 ; v1(10.033,3.937) 9.252,4.718 9.252,5.95 ; C7.1@10.414,57.952 9.224,57.952 8.001,56.729 v1(8.001,54.991) 5.207,54.991 4.826,55.372 J1.03@4.826,57.029 ; C13.1@13.335,57.912 15.2,57.912 15.24,57.952 22.82,57.952 27.686,53.086 27.686,51.308 ; R3.2@14.702,7.239 14.702,6.253 14.897,6.058 17.437,6.058 17.145,6.35 17.145,10.077 16.376,10.845 v1(15.004,10.845) 15.004,11.1 15.367,11.464 U4.2 ; v1(15.113,35.814) v1@15.113,35.981 ; C2.2 23.21,5.677 24.899,7.366 v1(25.146,7.366) 26.289,7.366 27.584,8.661 27.584,9.652 ; C3.1 20.973,11.129 22.323,12.479 23.843,12.479 24.511,11.811 24.511,9.906 25.273,9.144 27.076,9.144 27.584,9.652 ; R5.1@18.796,35.149 R5.1@18.908,35.037 ; R5.1@18.908,35.306 19.685,35.306 20.447,36.068 v1(24.638,36.068) ; v1(23.241,39.497) 24.638,39.497 25.821,40.68 ; R4.1 24.145,49.809 C9.1 26.162,49.784 27.686,51.308 ; C8.1 24.17,46.101 25.821,44.45 25.821,40.68 ; v1(26.924,41.783) 25.821,40.68 ; C4.1@27.472,13.335 27.305,13.168 27.305,12.827 27.838,12.294 U3.1@27.838,11.201 ; U3.1 27.584,9.652 ; v1(28.067,49.53) 28.067,50.927 27.686,51.308
  GND w0.254: v1(6.193,47.595) 6.388,47.79 6.388,48.562 7.366,49.54 7.366,51.816 8.445,52.895 8.445,53.911 9.525,54.991 ; v1(8.001,54.991) 9.525,54.991 ; v1(10.033,3.937) 12.065,1.905 16.383,1.905 ; v1(12.954,34.671) 25.146,34.671 28.067,37.592 v1(28.067,49.53) ; v1(14.605,51.689) 14.605,53.34 ; v1(15.004,10.845) 15.004,8.946 15.327,8.623 15.327,6.998 15.113,6.784 15.113,3.175 16.383,1.905 ; v1(15.113,35.814) 19.558,35.814 v1(23.241,39.497) ; v1(24.638,36.068) 24.575,36.131 24.575,41.084 v1(24.511,41.148) 26.122,41.148 26.757,41.783 v1(26.924,41.783) 26.924,52.324 25.273,53.975 14.754,53.975 14.605,53.826 14.605,53.34 ; v1(25.146,7.366) 23.876,8.636 22.733,8.636 ; v1(27.305,16.383) 25.908,14.986 24.384,14.986 23.368,13.97 23.368,12.827 22.733,12.192 22.733,8.636 ; 9.525,54.991 12.954,54.991 14.605,53.34 ; 16.383,1.905 19.812,1.905 21.844,3.937 21.844,7.747 22.733,8.636
  Bottom Layer w0.254: U2.12 26.464,28.242 ; v1(26.924,41.783) 27.686,41.021 27.686,29.464 26.464,28.242 ; v1(27.305,16.383) 27.305,18.648 25.59,20.362 25.59,27.368 26.464,28.242
NetC1_2: C1.2 J2.A4 J2.A9 J2.B4 J2.B9 R1.2 U4.4 | length 21
  Top Layer w0.254: R1.2@12.065,9.622 R1.2@11.917,9.474 ; U4.4 12.07,9.627 R1.2@11.917,9.474 ; 5.604,7.731 6.223,7.731 6.737,7.731 ; 5.604,7.731 6.737,7.731 ; 5.604,7.731 5.334,8.001 5.334,9.906 5.659,10.231 ; 5.659,10.231 6.223,10.231 6.734,10.231 ; 5.659,10.231 6.734,10.231 ; 6.734,10.231 6.984,10.481 ; 6.737,7.731 6.749,7.743 6.954,7.539 6.954,7.524 6.997,7.481 ; 6.984,10.481 7.523,10.481 8.722,10.481 ; 6.984,10.481 8.722,10.481 ; 6.997,7.481 7.523,7.481 6.997,7.481 ; 8.722,10.481 9.729,9.474 C1.2 ; C1.2 R1.2@11.917,9.474 ; C1.2 R1.2@11.917,9.474
NetC2_1: C2.1 J4.1 S1.2 U4.3 | length 48.2
  Top Layer w0.254: S1.2 5.855,20.701 7.493,19.063 7.493,17.145 8.128,16.51 ; C2.1@18.669,7.708 18.619,7.658 17.653,8.624 17.653,14.351 17.145,14.859 15.748,14.859 14.427,13.538 U4.3 12.421,12.217 8.128,16.51 ; J4.1 17.145,23.368 10.287,16.51 8.128,16.51
NetC3_2: C3.2 R6.1 U3.3 | length 11.1
  Top Layer w0.254: C3.2 20.015,9.779 v1(20.777,9.017) 20.972,9.211 21.34,9.211 22.962,10.833 U3.3 ; R6.1 19.954,13.193 v1(20.777,12.37)
  VDD w0.254: v1(20.777,9.017) v1(20.777,12.37)
NetD1_1: D1.1 R1.1 | length 25.7
  Top Layer w0.254: D1.1 1.375,27.708 1.524,27.559 2.645,27.559 2.836,27.368 2.836,17.738 4.654,15.92 7.702,15.92 10.23,13.392 10.23,11.557 10.85,10.937 R1.1
NetD1_2: D1.2 R2.2 U4.1 | length 36.2
  Top Layer w0.254: D1.2 5.407,28.841 5.957,28.841 7.747,27.051 7.747,24.511 8.636,23.622 v1(8.636,22.225) ; R2.2 11.861,6.589 13.574,4.876 v1(13.574,4.826) ; U4.1 16.154,12.37 16.154,13.085 16.637,13.568 v1(16.637,13.843)
  VDD w0.254: v1(8.636,22.225) 8.636,21.844 v1(16.637,13.843) 16.637,6.35 15.748,5.461 14.376,5.461 13.741,4.826 v1(13.574,4.826)
NetD2_1: D2.1 R2.1 | length 29.2
  Top Layer w0.254: D2.1 5.527,31.325 6.14,31.325 v1(6.858,30.607) ; R2.1 12.694,7.889 13.187,8.382 v1(13.462,8.382)
  VDD w0.254: v1(6.858,30.607) 6.858,22.36 9.906,19.312 9.906,15.748 13.462,12.192 v1(13.462,8.382)
NetD3_1: D3.1 S1.3 | length 29
  Top Layer w0.254: D3.1 4.975,36.372 6.83,38.227 v1(6.88,38.227) ; S1.3 5.855,22.701 8.315,20.241 8.315,19.466 v1(8.509,19.272)
  VDD w0.254: v1@6.731,38.227 6.731,34.514 5.842,33.625 5.842,20.955 7.493,19.304 8.477,19.304 v1(8.509,19.272)
NetD3_2: D3.2 R6.2 | length 36
  Top Layer w0.254: v1(1.375,34.373) D3.2 ; R6.2 18.654,13.096 v3(19.177,12.573)
  Signal Layer Top w0.254: v1@1.226,34.373 5.08,30.519 5.08,27.686 6.985,25.781 12.181,25.781 19.177,18.785 v3(19.177,12.573)
NetR3_1: R3.1 U4.5 | length 2.9
  Top Layer w0.254: U4.5 16.256,9.576 R3.1@16.256,7.493 ; R3.1@16.256,7.493 16.002,7.239 R3.1@16.256,7.493
P0_4: J5.1 R4.2 U1.53 | length 21
  Top Layer w0.2: U1.53 17.024,51.06
  Top Layer w0.254: v1(21.082,52.197) R4.2 ; J5.1@21.844,61.087 23.241,59.69 v1(24.511,59.69)
  Signal Layer Top w0.254: v3(17.399,52.705) 20.299,52.705 20.807,52.197 v1(21.082,52.197) 21.082,53.888 24.511,57.317 v1(24.511,59.69)
P3_5: J7.1 R5.2 U1.34 | length 42.2
  Top Layer w0.2: U1.34 17.424,38.587 18.702,37.309 R5.2@18.702,36.762
  Top Layer w0.254: J7.1@11.684,61.595 12.954,61.595 v1(13.97,60.579) ; R5.2@18.702,36.762 19,36.464 R5.2 R5.2@18.895,36.309 ; v3(22.098,37.211) 21.605,36.718 ; 21.605,36.718 19.05,36.718 21.605,36.718
  Signal Layer Bottom w0.254: v1(13.97,60.579) 15.748,60.579 18.796,57.531 21.209,57.531 22.098,56.642 v3(22.098,37.211)
SWDCK: J1.04 U1.12 | length 16.2
  Top Layer w0.2: v3(4.733,45.64) 4.826,45.546 4.826,42.926 5.561,42.191 7.938,42.191 8.22,42.473 8.274,42.526 8.489,42.742 U1.12
  Top Layer w0.254: J1.04@4.826,52.959 4.889,52.895 4.889,48.434 v1(4.909,48.415)
  Signal Layer Top w0.254: v3(4.733,45.64) 4.821,45.727 4.821,48.327 v1(4.909,48.415)
SWDIO: J1.02 U1.11 | length 16.1
  Top Layer w0.2: v3(6.096,44.958) 5.588,44.45 5.588,43.053 5.942,42.699 7.52,42.699 7.814,42.993 8.06,42.993 8.209,43.142 U1.11
  Top Layer w0.254: v1(6.096,50.038) J1.02@6.096,52.959
  Signal Layer Top w0.254: v3(6.096,44.958) 7.209,46.071 7.209,48.925 v1(6.096,50.038)
SWO: J1.06 U1.14 | length 17.6
  Top Layer w0.2: v3(3.385,44.928) 3.385,43.224 4.899,41.71 8.255,41.71 8.487,41.942 U1.14
  Top Layer w0.254: v1(3.556,50.038) J1.06@3.556,52.959
  Signal Layer Top w0.254: v3(3.385,44.928) 3.211,45.102 3.211,47.525 3.556,47.869 v1(3.556,50.038)
TDI: J1.08 U1.15 | length 19.4
  Top Layer w0.2: v3(2.794,41.783) 3.035,41.542 3.348,41.229 8.844,41.229 9.157,41.542 U1.15
  Top Layer w0.254: v1(2.286,48.387) J1.08@2.286,52.959
  Signal Layer Bottom w0.254: v1(2.286,48.387) 2.286,46.516 2.078,46.308 2.078,42.503 2.794,41.787 v3(2.794,41.783)
UART_CTS: U1.63 U2.3 | length 33.5
  Top Layer w0.2: v1(10.159,51.85) 10.159,51.817 13.024,48.952 U1.63
  Bottom Layer w0.254: v1(10.159,51.85) 10.159,51.815 8.509,50.165 8.509,26.666 9.914,25.261 U2.3@10.414,25.261
UART_RTS: U1.61 U2.1 | length 47.2
  Top Layer w0.2: v1(11.938,53.467) 11.938,51.437 14.013,49.362 14.013,48.728 13.824,48.539 U1.61
  Bottom Layer w0.254: U2.1@11.176,22.261 11.204,22.289 12.891,22.289 19.431,28.829 19.431,49.403 15.367,53.467 v1(11.938,53.467)
UART_RX: U1.64 U2.4 | length 28.9
  Top Layer w0.2: v1(10.201,50.326) 10.298,50.326 11.39,49.235 11.928,49.235 12.624,48.539 U1.64
  Bottom Layer w0.254: v1(10.201,50.326) 9.94,50.326 9.058,49.444 9.058,30.284 9.058,27.617 9.914,26.761 U2.4@10.414,26.761
UART_TX: U1.62 U2.2 | length 40
  Top Layer w0.2: v1(10.16,53.467) 11.176,52.451 11.176,51.48 13.421,49.235 ; U1.62 13.424,49.232
  Bottom Layer w0.254: v1(10.16,53.467) 8.001,51.308 8.001,25.019 9.259,23.761 U2.2@11.176,23.761
VCCA: J6.1 J8.1 U1.42 | length 14.4
  Top Layer w0.2: U1.42 19.958,43.542 20.066,43.434
  Top Layer w0.254: J8.1@7.62,61.595 9.525,59.69 12.319,59.69 12.827,59.182 14.986,59.182 16.256,60.452 16.256,60.706 16.51,60.96 17.653,60.96 J6.1
VCCD: U1.26 U1.57 | length 3
  Top Layer w0.2: U1.26 14.224,39.37 14.986,38.608 ; U1.57 15.424,48.931 15.621,49.128
VDD: C4.2 C5.2 C6.2 C7.2 C8.2 C9.2 C10.2 C11.2 C12.2 C13.2 J1.01 U1.17 U1.24 U1.35 U1.44 U1.52 U1.59 U1.67 U2.9 U3.2 U3.4 | length 207.7
  Top Layer w0.2: C6.2@4.572,38.227 7.087,40.742 8.681,40.742 ; C11.2 10.033,37.211 10.414,37.592 ; U1.17 8.681,40.742 ; C7.2@10.414,56.602 9.612,56.602 9.017,56.007 9.017,51.816 8.255,51.054 8.255,49.53 8.763,49.022 10.922,49.022 ; 10.922,49.005 11.424,48.503 U1.67 ; U1.24 13.424,38.062 12.954,37.592 11.684,37.592 ; C13.2@13.462,56.435 13.462,50.927 14.497,49.892 ; 14.497,48.63 14.624,48.503 U1.59 ; v1(15.494,33.655) 15.494,33.786 13.085,36.195 13.081,36.195 11.684,37.592 ; U1.52 17.424,49.421 ; 18.122,51.141 18.288,51.307 C5.2 ; U1.35 19.533,40.742 20.651,39.624 v3(20.701,39.624) ; U1.44 19.45,44.342 20.193,45.085 20.193,48.514 21.463,49.784 C9.2 ; 8.681,40.742 8.001,40.062 8.001,38.989 9.398,37.592 10.414,37.592 ; 10.414,37.592 11.684,37.592
  Top Layer w0.203: 10.922,49.005 10.922,49.022 ; 14.497,48.63 14.497,49.892 ; 17.424,49.421 17.424,50.443 18.122,51.141
  Top Layer w0.254: J1.01@6.096,57.029 6.096,57.542 6.339,57.785 6.339,57.658 7.344,57.658 7.493,57.807 7.493,58.547 8.128,59.182 11.557,59.182 11.938,58.801 11.938,57.15 12.486,56.602 ; C10.2 8.269,36.322 9.993,36.322 C11.2 ; C7.2@10.414,56.602 12.486,56.602 ; C13.2@13.509,56.555 13.545,56.518 C13.2@13.589,56.475 ; C5.2 19.732,54.276 19.732,55.579 20.777,56.624 ; C8.2 23.114,47.585 v1(23.114,45.807) v1@23.164,45.807 ; v1(22.987,2.032) 24.257,3.302 24.257,4.115 24.943,4.801 26.048,4.801 26.733,5.486 26.733,5.524 28.448,7.239 28.448,14.351 28.194,14.605 26.416,14.605 26.191,14.38 26.191,13.658 C4.2 ; v1(23.622,54.991) 21.989,56.624 20.777,56.624 ; U3.2@25.527,11.201 25.527,12.69 26.122,13.285 C4.2@26.122,13.335 ; 12.486,56.602 13.295,56.602 13.382,56.515 13.509,56.515 15.153,56.515 15.534,56.896 15.534,56.703 15.613,56.624 20.777,56.624
  VDD w0.254: v1(15.494,33.655) 15.748,33.655 18.923,30.48 25.4,30.48 v1@26.67,31.75 ; v1(23.114,45.807) 23.114,49.784 23.622,50.292 v1(23.622,54.991)
  Signal Layer Top w0.254: v3(20.701,39.624) 23.114,42.037 v1(23.114,45.807)
  Bottom Layer w0.254: v1@23.241,2.032 21.971,3.302 21.971,31.337 23.376,32.742 U2.9 24.163,32.742 24.511,33.09 24.511,33.636 25.654,34.779 26.67,33.763 v1(26.67,31.731) ; v1(23.622,54.991) 25.654,52.959 25.654,34.798
pads on no net: J2.A2 J2.A3 J2.A5 J2.A6 J2.A7 J2.A8 J2.A10 J2.A11 J2.B2 J2.B3 J2.B5 J2.B6 J2.B7 J2.B8 J2.B10 J2.B11 J2.S S1.1 S1.M U1.1 U1.2 U1.3 U1.4 U1.5 U1.6 U1.7 U1.8 U1.13 U1.16 U1.18 U1.19 U1.20 U1.21 U1.22 U1.23 U1.27 U1.28 U1.29 U1.30 U1.31 U1.32 U1.33 U1.36 U1.37 U1.38 U1.39 U1.40 U1.41 U1.46 U1.47 U1.48 U1.49 U1.50 U1.51 U1.54 U1.55 U1.56 U1.60 U1.65 U1.66 U1.68 U1.69 U2.5 U2.6 U2.7 U2.8 U2.10 U2.11 U2.13 U2.14 U2.15 U2.16
copper on no net: | length 79.6
  Top Layer w0.2: 14.986,38.608 14.986,38.354 14.986,37.846 v1@15.389,37.443 ; 15.621,49.128 v1@16.002,49.509 ; 17.024,51.06 17.399,51.435 17.399,52.705 ; 20.066,43.434 v1@20.701,42.799
  Top Layer w0.254: 1.433,16.151 1.433,25.251 ; 4.305,22.701 4.505,22.701 ; 11.811,44.196 11.834,44.219 13.375,44.219 ; 11.811,45.085 12.509,45.085 13.375,44.219 ; 11.811,45.974 11.938,45.974 ; 12.065,46.101 11.938,45.974 ; 12.827,45.085 13.97,43.942 ; v2@12.827,46.101 12.827,45.974 12.827,45.339 ; 13.081,43.053 13.97,43.942 ; v2@13.589,46.101 13.589,44.577 ; 13.843,45.085 v2@13.843,44.323 ; 14.097,43.942 13.97,43.942 ; 14.224,44.577 14.224,44.196 14.224,44.45 ; 14.351,46.101 14.224,45.974 14.224,45.593 ; v2@14.795,45.148 15.621,45.974 v2@15.748,45.974 ; 14.859,45.974 14.605,45.974 14.224,45.593 ; 15.113,46.101 14.922,45.91 14.224,45.212 ; v1@15.389,37.443 15.728,37.443 v1(15.834,37.337) v1@15.875,37.378 ; v2@15.875,46.101 15.875,45.974 v2@15.748,45.974 ; v1@16.002,49.509 v1(16.002,49.784) ; 16.891,45.974 15.875,44.958 15.24,44.958 14.224,43.942 14.097,44.069 ; 17.907,61.087 18.161,60.833 19.05,59.944 v1@19.865,59.129 ; v1@19.791,59.055 v1(20.066,59.055) ; v1@20.701,42.799 v1(20.828,42.672) ; 11.938,45.974 12.065,45.974 12.192,45.974 12.827,45.339 ; 12.827,45.339 13.589,44.577 ; 13.375,44.219 13.652,43.942 13.97,43.942 ; 13.589,44.577 v2@13.843,44.323 ; v2@13.843,44.323 13.843,44.069 13.97,43.942 ; v2@13.843,44.323 14.097,44.069 ; 13.97,43.942 14.097,44.069 ; 14.224,44.45 14.859,45.085 v2@15.748,45.974 ; 14.224,44.45 14.224,45.212 ; 14.224,45.212 14.224,45.593
  VDD w0.254: v1(15.834,37.337) 17.232,38.735 19.304,38.735 19.685,39.116 19.685,48.768 18.669,49.784 v1(16.002,49.784) ; v1(20.066,59.055) 20.066,56.822 20.574,56.314 20.574,54.356 19.685,53.467 19.685,51.562 20.828,50.419 v1(20.828,42.672)
  other v2: 11.684,41.656 12.7,41.656 13.716,41.656 14.732,41.656 15.748,41.656 16.764,41.656 11.684,42.545 12.7,42.545 13.716,42.545 14.732,42.545 15.748,42.545 16.764,42.545 11.684,43.434 12.7,43.434 13.716,43.434 14.732,43.434 15.748,43.434 16.764,43.434 11.684,44.323 12.7,44.323 13.716,44.323 14.732,44.323 15.748,44.323 16.764,44.323 11.684,45.212 12.7,45.212 13.716,45.212 14.732,45.212 15.748,45.212 16.764,45.212 11.684,46.101 12.7,46.101 13.716,46.101 14.732,46.101 15.748,46.101 16.764,46.101

## Silkscreen, mask and mechanical layers (free items; w line width, h text height)
Top Overlay:
  text "3.3V" at 5.969,59.563 h1 r90
  text "3.3V" at 16.383,59.563 h1 r90
  text "BAT+" at 25.527,21.844 h1.2 r90
  text "BAT-" at 25.527,16.129 h1.2 r90
Bottom Overlay:
  text "TRABAJO DE FIN DE GRADO" at 4.976,19.454 h1 r270
  text "DE LA ATENCION EN LA CONDUCCION" at 2.182,15.898 h1 r270
  text "DISENO DE UN SISTEMA DE DETECCION" at 3.579,15.009 h1 r270

## Text inside footprints (layer, text, board x,y; h text height)
U1: Mechanical 13 "*" at 10.363,46.707 h1.27